# Altium PCB PCB2.PcbDoc (part 4 of 4)
Units mil, origin at the board's own origin, x right, y up, seen from the top; angles counter-clockwise.
Board outline 7874.02 x 7086.61 mil, 2 copper layers (Top Layer, Bottom Layer); 393 components, 284 nets, 1417 pads, 404 vias.
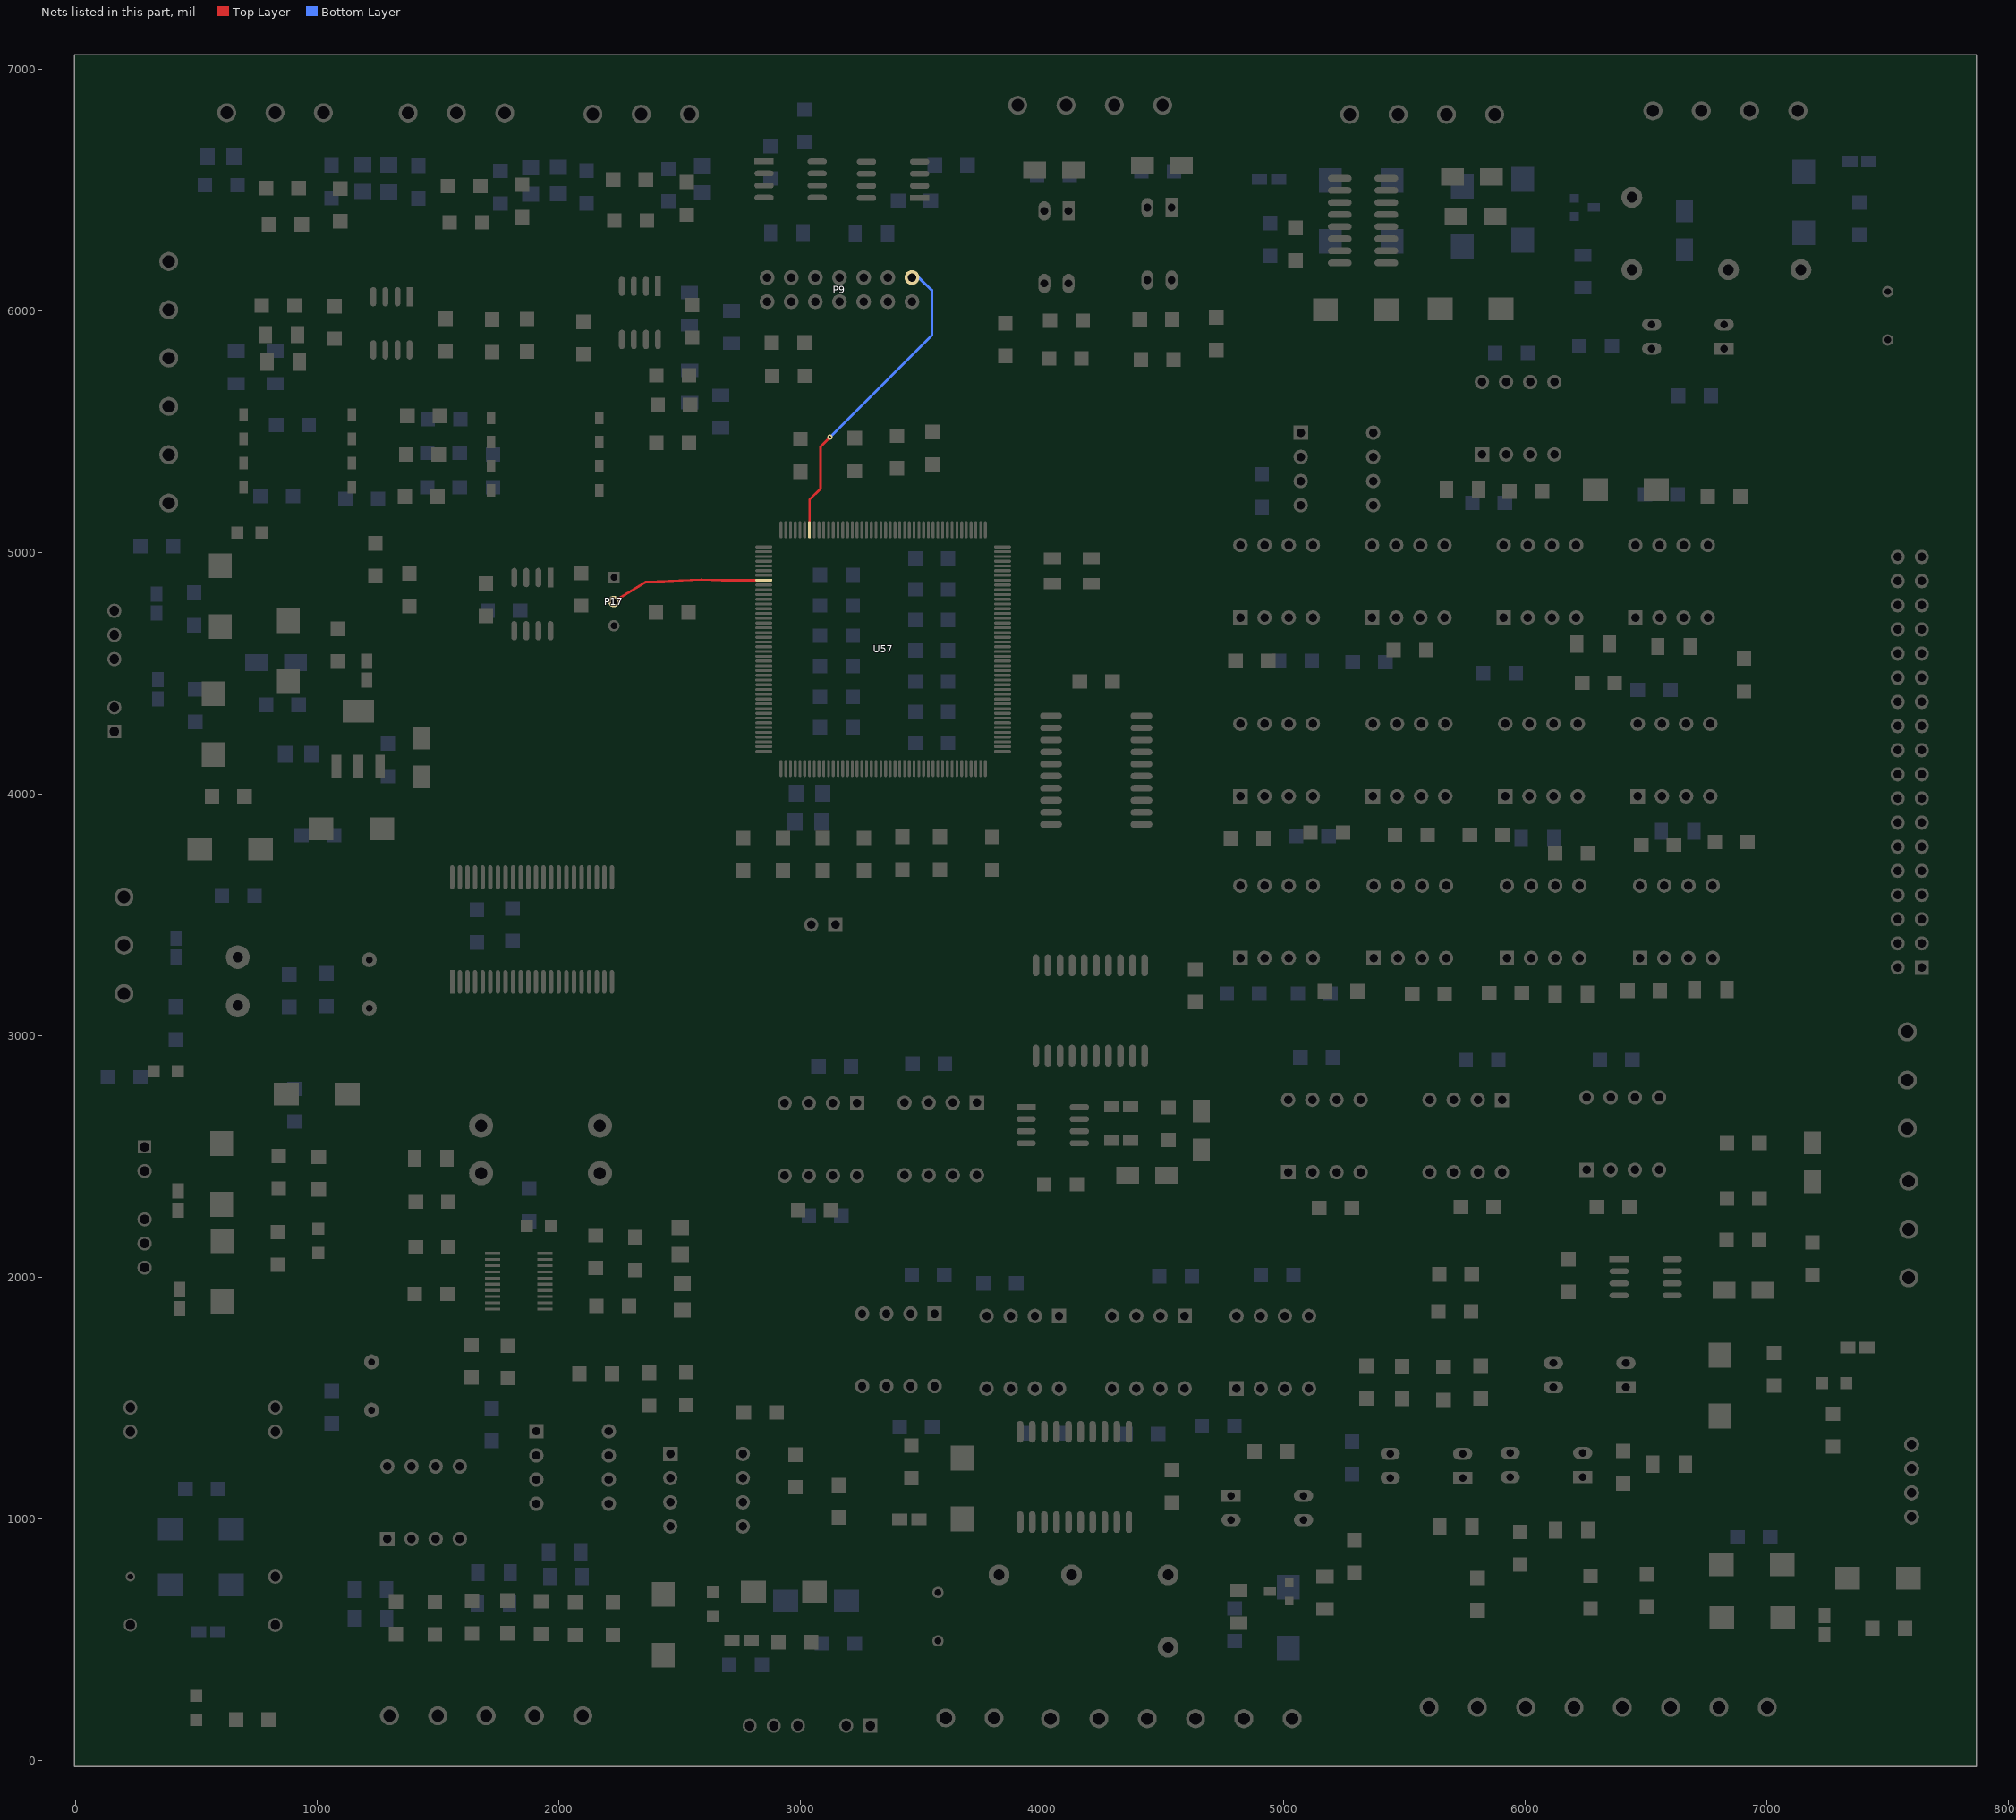
[diagram p4: the nets of this part, all layers, seen from the top]

## Via types
v1: diameter 22, hole 12, Top Layer to Bottom Layer, 63 vias
v2: diameter 19, hole 11, Top Layer to Bottom Layer, 42 vias
v3: diameter 50, hole 28, Top Layer to Bottom Layer, 34 vias
v4: diameter 15, hole 8, Top Layer to Bottom Layer, 27 vias
v5: diameter 35, hole 22, Top Layer to Bottom Layer, 25 vias
v6: diameter 16, hole 8, Top Layer to Bottom Layer, 23 vias
v7: diameter 30, hole 15, Top Layer to Bottom Layer, 22 vias
v8: diameter 22, hole 11, Top Layer to Bottom Layer, 14 vias
v9: diameter 17, hole 8, Top Layer to Bottom Layer, 13 vias
v10: diameter 35, hole 20, Top Layer to Bottom Layer, 12 vias
v11: diameter 16, hole 7, Top Layer to Bottom Layer, 10 vias
v12: diameter 18, hole 8, Top Layer to Bottom Layer, 9 vias
v13: diameter 25, hole 15, Top Layer to Bottom Layer, 8 vias
v14: diameter 40, hole 22, Top Layer to Bottom Layer, 8 vias
v15: diameter 45, hole 22, Top Layer to Bottom Layer, 7 vias
v16: diameter 25, hole 12, Top Layer to Bottom Layer, 6 vias
v17: diameter 15, hole 7, Top Layer to Bottom Layer, 6 vias
v18: diameter 15, hole 9, Top Layer to Bottom Layer, 6 vias
v19: diameter 35, hole 18, Top Layer to Bottom Layer, tented bottom, 6 vias
v20: diameter 27, hole 15, Top Layer to Bottom Layer, 5 vias
v21: diameter 40, hole 18, Top Layer to Bottom Layer, 4 vias
v22: diameter 50, hole 30, Top Layer to Bottom Layer, 4 vias
v23: diameter 14, hole 7, Top Layer to Bottom Layer, 4 vias
v24: diameter 157.48, hole 137.8, Top Layer to Bottom Layer, 4 vias
v25: diameter 35, hole 15, Top Layer to Bottom Layer, 4 vias
v26: diameter 35, hole 18, Top Layer to Bottom Layer, 3 vias
v27: diameter 25, hole 11, Top Layer to Bottom Layer, 3 vias
v28: diameter 17, hole 9, Top Layer to Bottom Layer, 3 vias
v29: diameter 22, hole 15, Top Layer to Bottom Layer, 3 vias
v30: diameter 30, hole 17, Top Layer to Bottom Layer, 2 vias
v31: diameter 20, hole 12, Top Layer to Bottom Layer, 2 vias
v32: diameter 28, hole 15, Top Layer to Bottom Layer, 2 vias
v33: diameter 45, hole 25, Top Layer to Bottom Layer, 2 vias
v34: diameter 40, hole 18, Top Layer to Bottom Layer, tented bottom, 2 vias
v35: diameter 47, hole 30, Top Layer to Bottom Layer, 1 vias
v36: diameter 30, hole 18, Top Layer to Bottom Layer, 1 vias
v37: diameter 27, hole 17, Top Layer to Bottom Layer, 1 vias
v38: diameter 12, hole 7, Top Layer to Bottom Layer, 1 vias
v39: diameter 18, hole 10, Top Layer to Bottom Layer, 1 vias
v40: diameter 45, hole 30, Top Layer to Bottom Layer, 1 vias
v41: diameter 18, hole 11, Top Layer to Bottom Layer, 1 vias
v42: diameter 26, hole 15, Top Layer to Bottom Layer, 1 vias
v43: diameter 18, hole 9, Top Layer to Bottom Layer, 1 vias
v44: diameter 50, hole 32, Top Layer to Bottom Layer, 1 vias
v45: diameter 24, hole 15, Top Layer to Bottom Layer, 1 vias
v46: diameter 50, hole 22, Top Layer to Bottom Layer, 1 vias
v47: diameter 20, hole 10, Top Layer to Bottom Layer, 1 vias
v48: diameter 17, hole 7, Top Layer to Bottom Layer, 1 vias
v49: diameter 34, hole 15, Top Layer to Bottom Layer, 1 vias
v50: diameter 35, hole 17, Top Layer to Bottom Layer, 1 vias

## Nets (pads, with @x,y where several pads share a name; then routed paths per layer and width w, separated by ;. In a path a pad name is that pad's centre, name@x,y a point inside that pad or via, vN(x,y) a via of type N, cw(c..) or ccw(c..) an arc to the next point about the centre after c; other vN are vias at no path point) (continued)
TMS: P9.1 U57.126 | length 1308.6
  Top Layer w10: U57.126@3037.88,5095.09 3037.88,5218.88 3084,5265
  Top Layer w11.81: 3084,5265 3084,5440 v1(3123,5479)
  Bottom Layer w11.81: v1(3123,5479) 3545,5901 3545,6088 ; P9.1@3462,6139.67 3490.33,6139.67 3545,6085
XF_XPLLDIS: P17.2 U57.140 | length 643.9
  Top Layer w10: P17.2@2228,4798 2361,4879 2591,4889 2675.57,4886.43 U57.140@2848.91,4886.43
pads on no net: DCDC3.9 DCDC3.11 DCDC4.5 P9.6 P12.2 P13.2 P16.2 U10.7 U10.8 U11.7 U11.8 U15.1 U15.4 U15.7 U16.1 U16.4 U16.7 U18.1 U18.4 U18.7 U24.1 U24.4 U24.7 U25.1 U25.4 U25.7 U26.1 U26.4 U26.7 U27.1 U27.4 U27.7 U28.1 U28.4 U28.7 U29.1 U29.4 U29.7 U30.1 U30.4 U30.7 U31.1 U31.4 U31.7 U32.1 U32.4 U32.7 U33.1 U33.4 U33.7 U34.1 U34.4 U34.7 U35.1 U35.4 U35.7 U36.1 U36.4 U36.7 U37.1 U37.4 U37.7 U38.1 U38.4 U38.7 U39.11 U39.12 U39.13 U39.14 U41.1 U41.4 U41.7 U42.1 U42.4 U42.7 U43.1 U43.4 U43.7 U45.1 U45.4 U45.7 U47.5 U48.1 U48.4 U48.7 U49.1 U49.4 U49.7 U50.1 U50.4 U50.7 U52.1 U52.4 U52.7 U53.1 U54.1 U54.11 U54.20 U56.12 U56.14 U57.4 U57.5 U57.6 U57.7 U57.8 U57.9 U57.28 U57.44 U57.51 U57.53 U57.55 U57.61 U57.62 U57.63 U57.66 U57.67 U57.71 U57.79 U57.82 U57.83 U57.102 U57.104 U57.106 U57.107 U57.109 U57.115 U57.116 U57.119 U57.124 U57.149 U57.158 U57.159 U57.161 U57.164 U57.167 U57.168 U57.171 U61.3 U61.17 U62.28 Y1.2 Y1.4
copper on no net:
  other v24: 189.84,176.04 7670.16,176.04 189.84,6868.96 7670.16,6868.96

## Keep-outs
Keep-Out Layer:
  lines w10: 25,0 7840,0 7840,7030 25,7030 25,7015 25,0

## Silkscreen, mask and mechanical layers (free items; w line width, h text height)
Top Overlay:
  circle w10: c7670.16,6868.96 r136.22
  circle w10: c7670.16,176.04 r136.22
  circle w10: c189.84,176.04 r136.22
  circle w10: c189.84,6868.96 r136.53
  text "GND" at 3785,6895 h40 r180
  text "GND" at 6102,6884 h40 r180
  text "-15" at 2722,6883 h30 r180
  text "-15" at 1200,6879 h30 r180
  text "24V" at 7360,6877 h40 r180
  text "-15" at 1956,6866 h30 r180
  text "+15" at 514,6828 h40 r180
  text "5V_C" at 5157,6822 h40 r180
  text "+15" at 1266,6817 h30 r180
  text "+15" at 2033,6808 h30 r180
  text "GND" at 4340,6671 h40 r180
  text "GND" at 7017,6646 h40 r180
  text "RX" at 5513,6637 h40 r180
  text "GND" at 157,6263 h40 r270
  text "A2" at 159,6031 h40 r270
  text "GND" at 160,5845 h40 r270
  text "GND" at 155,5645 h40 r270
  text "A1" at 166,5455 h40 r270
  text "SRMcontrol.SDU_V1.0" at 7785,5372 h60 r90
  text "+10V" at 155,5209 h40 r270
  text "24V_IN" at 106,3913 h40 r270
  text "GND_IN" at 86,3057 h40 r270
  text "485B" at 7813,2974 h40 r90
  text "485A" at 7814,2569 h40 r90
  text "CANH" at 7814,2375 h40 r90
  text "CANL" at 7814,1902 h40 r90
  text "GND" at 6322,400 h40
  text "GND" at 5534,397 h40
  text "GND" at 5930,397 h40
  text "GND" at 6732,397 h40
  text "B" at 1684,370 h40
  text "C" at 1464,367 h40
  text "A" at 1906,361 h40
  text "24V_F" at 7124,219 h40
  text "GND_COM" at 5153,183 h40
  text "GND_P" at 992,174 h40
  text "12V_P" at 2215,158 h40
Bottom Overlay:
  text "TX" at 5648,6755 h40 r180
  text "DATA_OUT" at 4771,270 h40
  text "CLK" at 4908,69 h40
  text "5V_COM" at 4140,57 h40
  text "CS" at 4261,57 h40
  text "DATA_IN" at 4581,56 h40
Mechanical 1:
  lines w45: 1576,6784 1576,6821

## Text inside footprints (layer, text, board x,y; h text height)
CON1: Top Overlay "2" at 7563.15,3162.76 h41.34 r90; Top Overlay "1" at 7663.15,3182.76 h41.34 r90; Top Overlay "35" at 7663.15,5042.76 h41.34 r90; Top Overlay "36" at 7563.15,5042.76 h41.34 r90
DCDC1: Top Overlay "1" at 328.31,4250.16 h41.34 r90; Top Overlay "6" at 328.31,4740.31 h41.34 r90; Top Overlay "2" at 328.31,4340.31 h41.34 r90; Top Overlay "4" at 328.31,4540.31 h41.34 r90
DCDC2: Top Overlay "1" at 116.69,2549.84 h41.34 r270; Top Overlay "6" at 116.69,2059.69 h41.34 r270; Top Overlay "2" at 116.69,2459.69 h41.34 r270; Top Overlay "4" at 116.69,2259.69 h41.34 r270
DCDC4: Top Overlay "1" at 3299.84,379.24 h41.34 r180; Top Overlay "6" at 2809.69,379.24 h41.34 r180; Top Overlay "2" at 3209.69,379.24 h41.34 r180; Top Overlay "4" at 3009.69,379.24 h41.34 r180
Y1: Top Overlay "1" at 3979,4852 h39.37